# Altium PCB LEDLightRing_PCB.PcbDoc
Units mil, origin at the board's own origin, x right, y up, seen from the top; angles counter-clockwise.
Board outline 2220 x 2220 mil, 2 copper layers (Top Layer, Bottom Layer), stack 62 mil thick; 20 components, 19 nets, 82 pads, 10 vias.
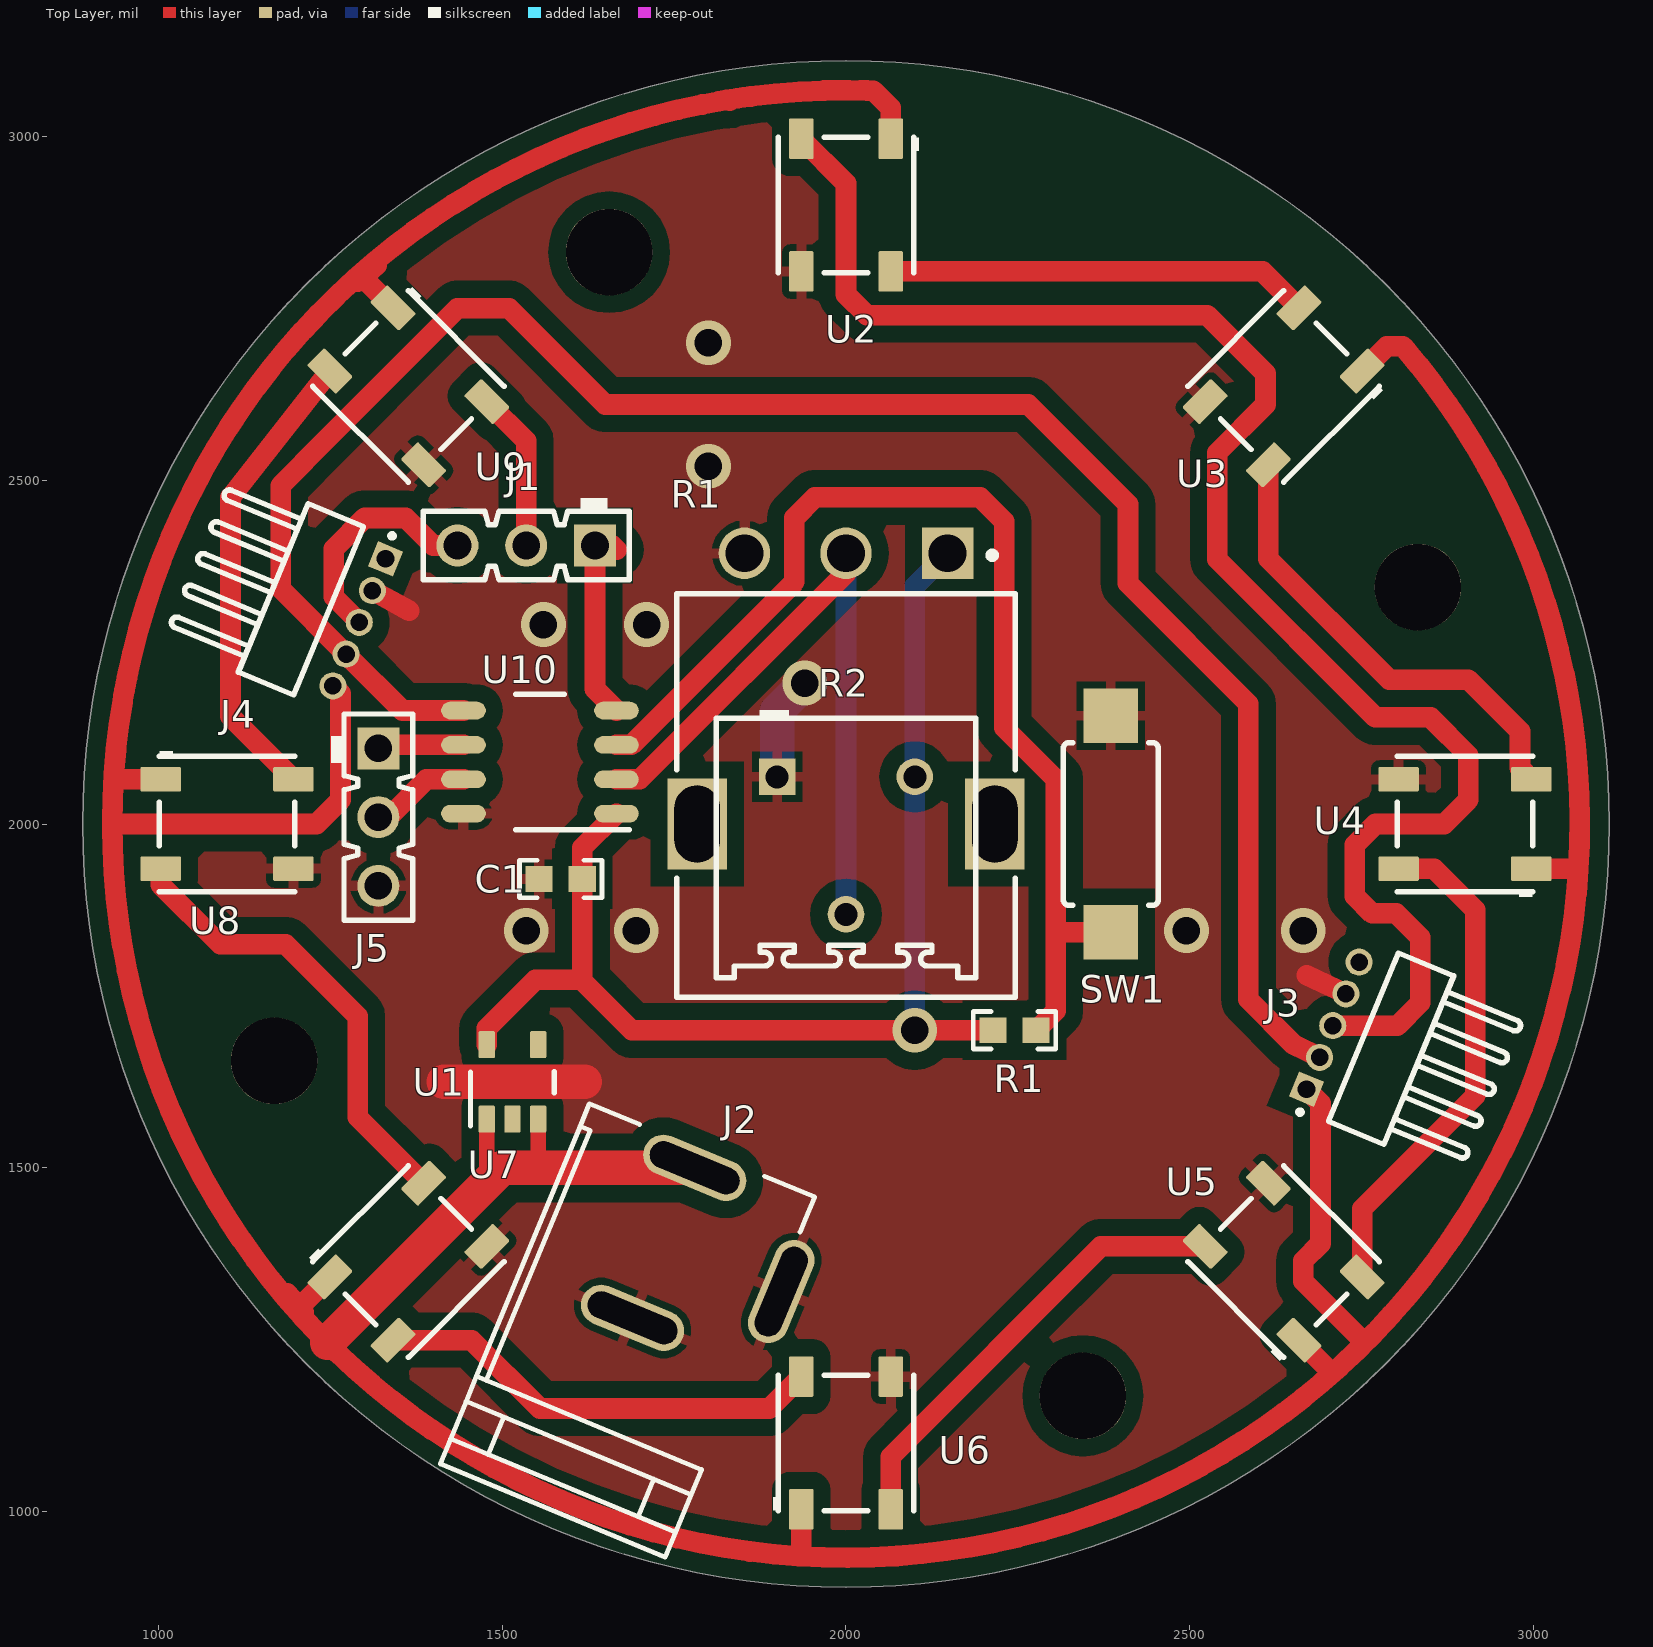
[diagram p0: Top Layer view]
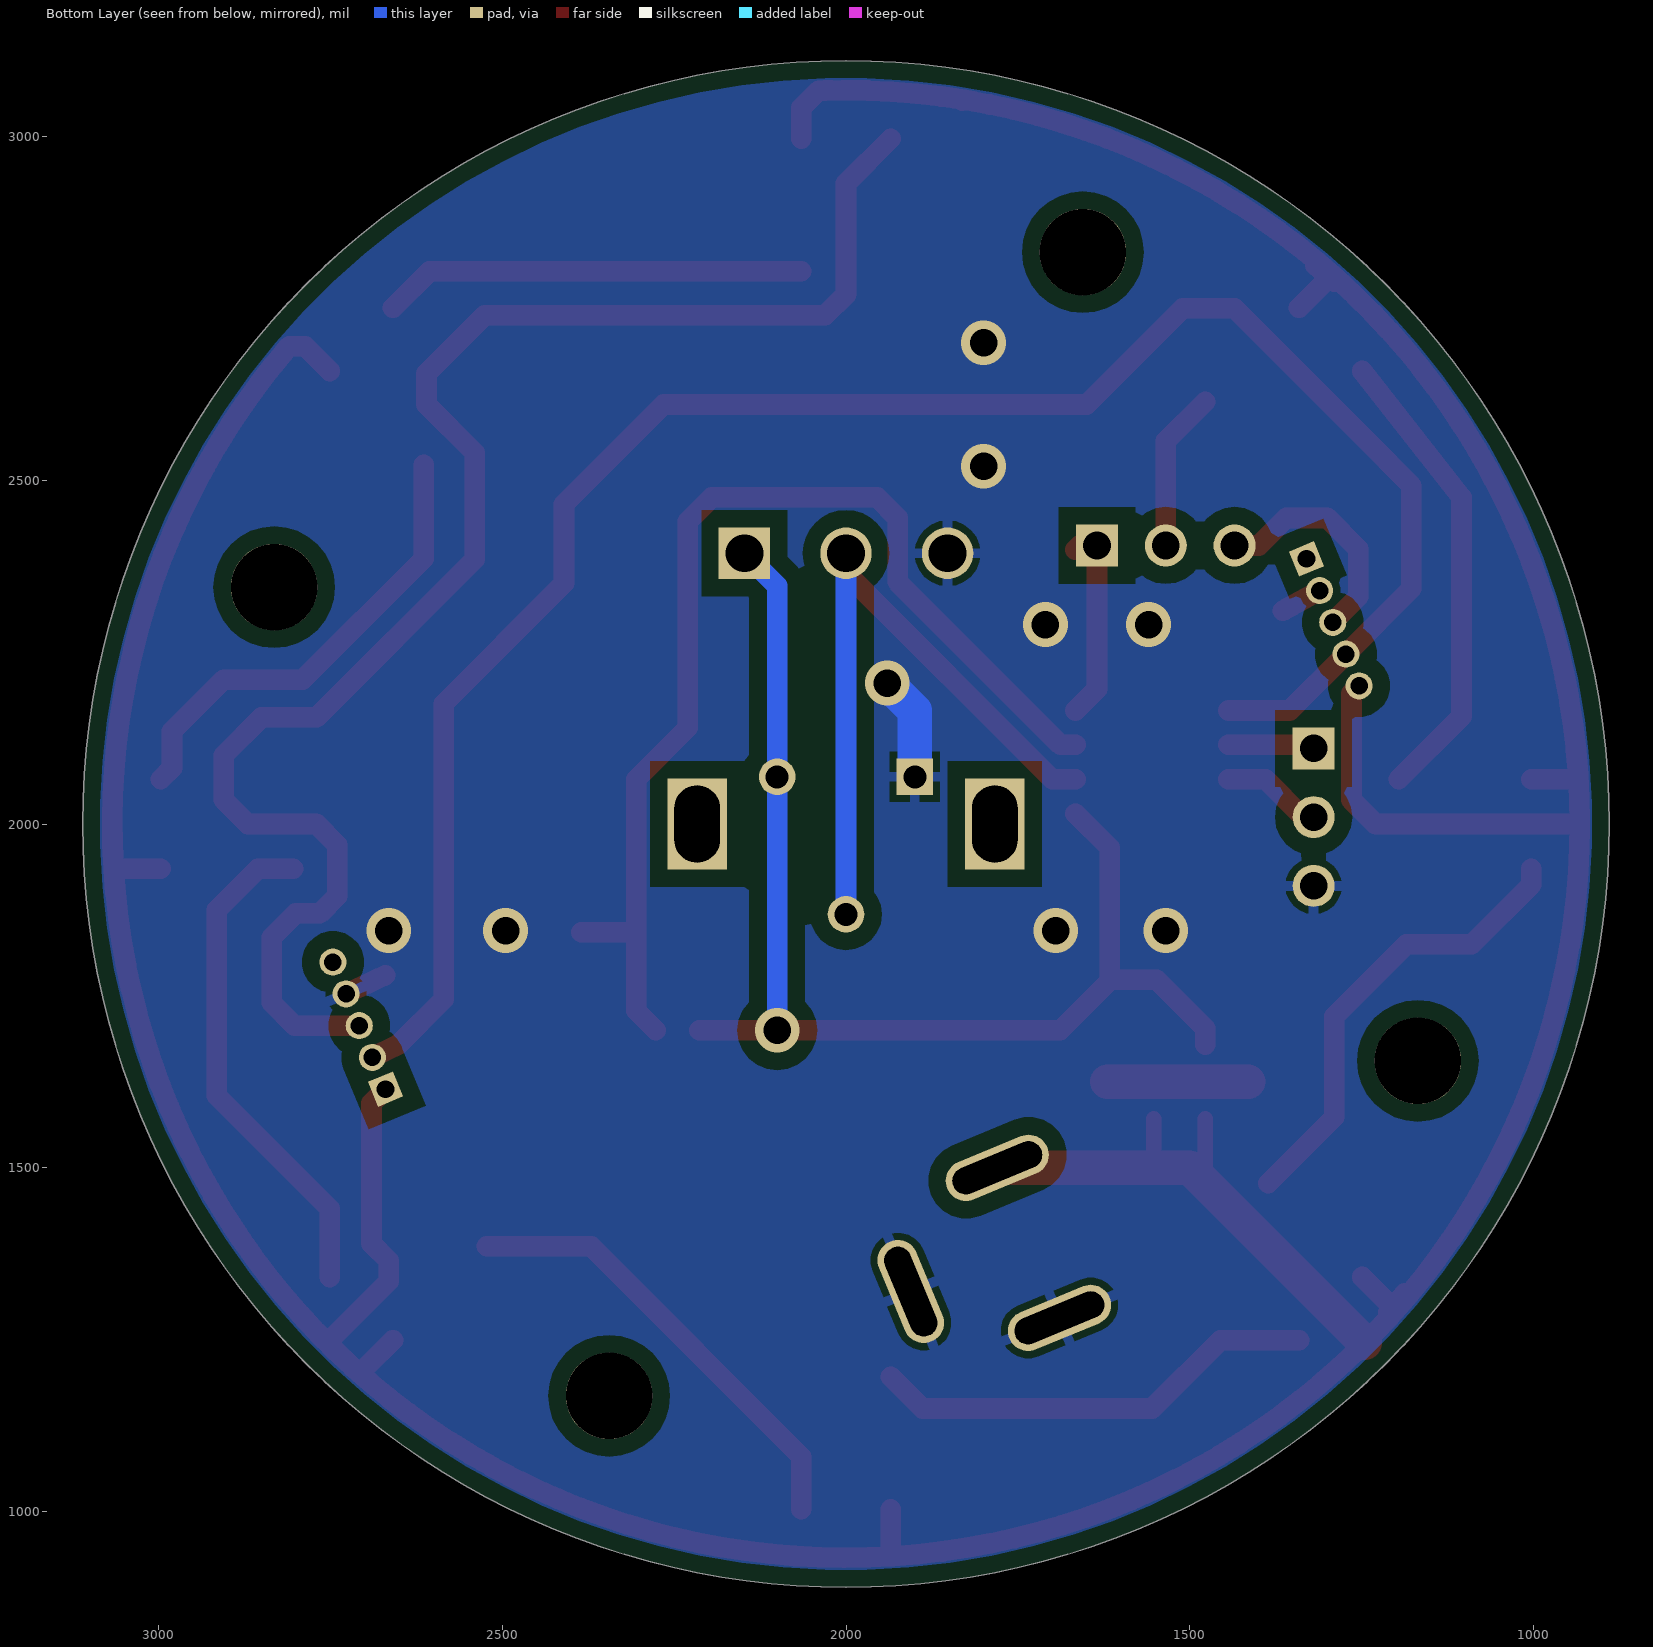
[diagram p1: Bottom Layer view, seen from below]
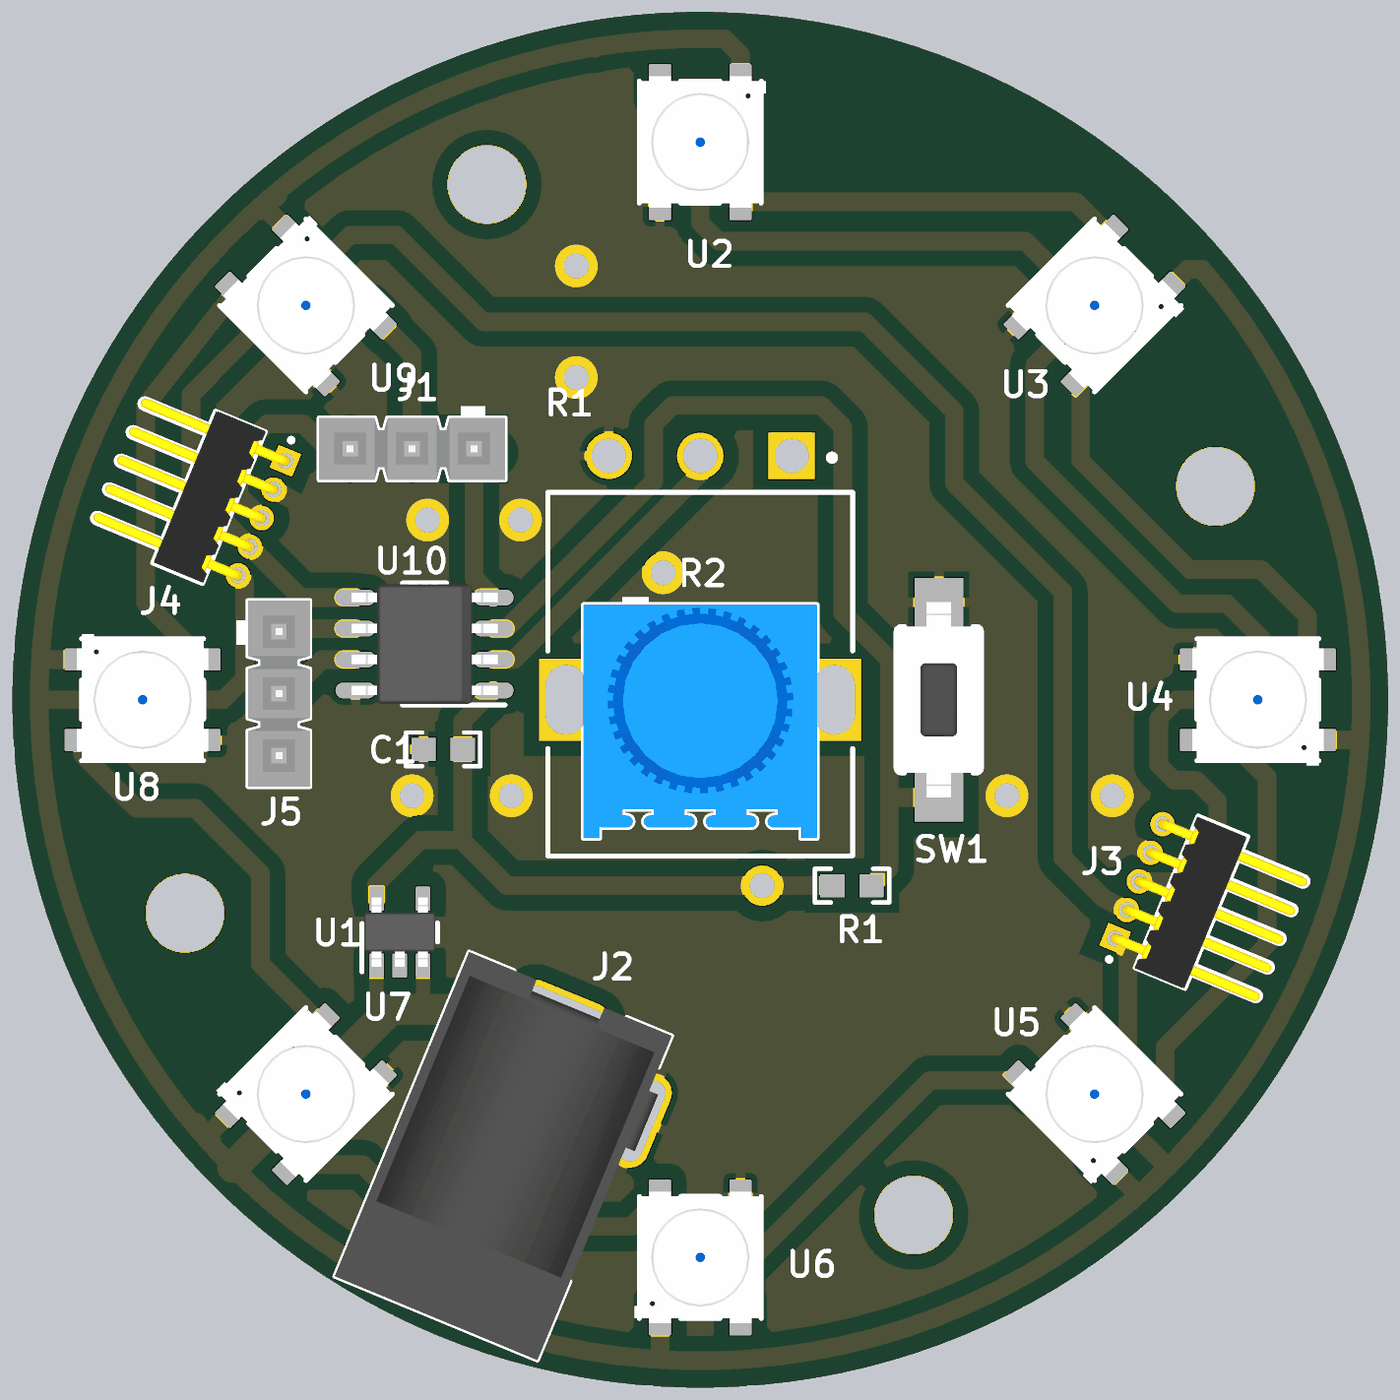
[diagram p2: 3D render of the assembled board from above, using the file's embedded part models]

## Layer stack, top to bottom
Top Solder: solder mask 0.4, Solder Resist, Dk 3.5
Top Layer: signal copper 1.4
Dielectric1: core 59.2, FR-4, Dk 4.8
Bottom Layer: signal copper 1.4
Bottom Solder: solder mask 0.4, Solder Resist, Dk 3.5

## Board outline
2000,890 cw(c2000,2000) 890,2000 cw(c2000,2000) 2000,3110 cw(c2000,2000) 3110,2000 cw(c2000,2000)

## Design rules (kind name [scope] priority, off if disabled: settings)
AcuteAngle [All] p1: minimum=4.50000000000000E+0001 checktracksonly=FALSE
AssemblyTestPointUsage [All] p1: valid=2
BoardOutlineClearance BoardOutlineClearance_MountingHoles [OnCopper and InComponentClass('Mounting Holes')] p1: gap=40 ignorepadtopadclearanceinfootprint=FALSE
BoardOutlineClearance BoardOutlineClearance_Poly [OnCopper and IsPoly] p2: gap=25 ignorepadtopadclearanceinfootprint=FALSE
BoardOutlineClearance [OnCopper and Not InComponentClass('Logo') and not InComponentClass('FiducialMark') and not InRegion(1000,500,4000,800) and not InPoly] p3: gap=15 ignorepadtopadclearanceinfootprint=FALSE
Clearance Clearance_Keepouts [((IsTrack Or IsArc) And Not InPoly) And IsFree and IsKeepOut vs ((IsTrack Or IsArc) And Not InPoly) And IsFree and IsKeepOut] p1: gap=0 ignorepadtopadclearanceinfootprint=FALSE
Clearance Clearance_Poly [InPolygon] p2: gap=25 ignorepadtopadclearanceinfootprint=FALSE except(0: Arc-Hole Track-Hole SMDPad-Hole THPad-Hole Via-Hole Fill-Hole Poly-Hole Region-Hole Text-Hole)
Clearance [All] p3: gap=7.87 ignorepadtopadclearanceinfootprint=FALSE except(0: Arc-Hole Track-Hole SMDPad-Hole THPad-Hole Via-Hole Fill-Hole Poly-Hole Region-Hole Text-Hole)
ComponentClearance ComponentClearance_MountingHoles_FiducialMarks [InComponentClass('Mounting Holes') vs InComponentClass('FiducialMark')] p1 off: gap=50 collisioncheckmode=3 verticalgap=10 showdistances=FALSE
ComponentClearance ComponentClearance_Shunt [InComponentClass('Header') vs InComponentClass('Shunt')] p2 off: gap=0 collisioncheckmode=3 verticalgap=0 showdistances=FALSE
ComponentClearance ComponentClearance_Logo [InComponentClass('Logo')] p3 off: gap=50 collisioncheckmode=3 verticalgap=10 showdistances=FALSE
ComponentClearance ComponentClearance_ScrewToNut [(HasFootprint('NY PMS 440 0025 PH')) vs (HasFootprint('Keystone_1902C'))] p4 off: gap=5 collisioncheckmode=3 verticalgap=10 showdistances=FALSE
ComponentClearance ComponentClearance_MountingHoles [InComponentClass('Mounting Holes')] p5 off: gap=250 collisioncheckmode=3 verticalgap=100000 showdistances=FALSE
ComponentClearance ComponentClearance_SmallPassives [HasFootprint('0201*') or HasFootprint('0402*') or HasFootprint('0508') or HasFootprint('0603*') or HasFootprint('0612') or HasFootprint('0805*') or HasFootprint('0815*') or HasFootprint('0830*') or HasFootprint('1206*') or HasFootprint('1210*') or HasFootprint('1808*') or HasFootprint('1812*') or HasFootprint('1825*') or HasFootprint('2010*') or HasFootprint('2220*') or HasFootprint('2225*') or HasFootprint('2512*') or HasFootprint('2728*') or HasFootprint('3518*') vs HasFootprint('0201*') or HasFootprint('0402*') or HasFootprint('0508') or HasFootprint('0603*') or HasFootprint('0612') or HasFootprint('0805*') or HasFootprint('0815*') or HasFootprint('0830*') or HasFootprint('1206*') or HasFootprint('1210*') or HasFootprint('1808*') or HasFootprint('1812*') or HasFootprint('1825*') or HasFootprint('2010*') or HasFootprint('2220*') or HasFootprint('2225*') or HasFootprint('2512*') or HasFootprint('2728*') or HasFootprint('3518*')] p6 off: gap=14.96 collisioncheckmode=3 verticalgap=10 showdistances=FALSE
ComponentClearance ComponentClearance_THtoSMT [IsThruComponent vs IsSMTComponent] p7 off: gap=40 collisioncheckmode=3 verticalgap=30 showdistances=FALSE
ComponentClearance ComponentClearance_THtoTH [IsThruComponent vs IsThruComponent] p8 off: gap=30 collisioncheckmode=3 verticalgap=30 showdistances=FALSE
ComponentClearance [All] p9 off: gap=5 collisioncheckmode=3 verticalgap=10 showdistances=FALSE
DiffPairsRouting [All] p1: maxlimit=100 minlimit=10 mostfreqgap=10 toplayer_minwidth=15 toplayer_maxwidth=15 toplayer_prefwidth=15 bottomlayer_minwidth=15 bottomlayer_maxwidth=15 bottomlayer_prefwidth=15 maxuncoupledlength=1000
FabricationTestPointUsage TestPointUsage [All] p1: valid=2 allowmultiple=FALSE
FabricationTestpoint Testpoint [All] p1: side=3 testpointundercomponent=TRUE minsize=40 maxsize=100 preferedsize=60 minholesize=0 maxholesize=40 preferedholesize=32 testpointgrid=1 allowsidetop=TRUE allowsidebottom=TRUE usegrid=TRUE gridtolerance=0.01
FanoutControl Fanout_LCC [IsLCC] p1: bgadir=Out bgaviamode=Centered fanoutstyle=Auto fanoutdirection=Alternating viagrid=1 // Fanout_LCC (Default Rule)
FanoutControl Fanout_BGA [IsBGA] p2: bgadir=Out bgaviamode=Centered fanoutstyle=Auto fanoutdirection=Alternating viagrid=1 // Fanout_BGA (Default Rule)
FanoutControl Fanout_Default [All] p4: bgadir=Out bgaviamode=Centered fanoutstyle=Auto fanoutdirection=Alternating viagrid=1 // Fanout_Default (Default Rule)
FanoutControl Fanout_Small [(CompPinCount < 5)] p5: bgadir=Out bgaviamode=Centered fanoutstyle=Auto fanoutdirection=OutThenIn viagrid=1 // Fanout_Small (Default Rule)
HoleSize [All] p1: absolutevalues=TRUE maxlimit=251 minlimit=7.87 maxpercent=80.000 minpercent=20.000
MinimumAnnularRing MinimumAnnularRing_ThermalPadVias [IsVia and InAnyComponent] p1 off: minimumring=5.91
MinimumAnnularRing [All] p2 off: minimumring=8
MinimumSolderMaskSliver MinimumSolderMaskSliver_Logo [InComponentClass('Logo') vs InComponentClass('Logo')] p1 off: minsoldermaskwidth=0.7
MinimumSolderMaskSliver [All] p2 off: minsoldermaskwidth=3.94
PlaneConnect [All] p1: planeconnectstyle=Relief reliefexpansion=10 reliefentries=4 reliefconductorwidth=10 reliefairgap=10
PolygonConnect PolygonConnect_Vias [All vs isVia] p1: connectstyle=Direct reliefconductorwidth=10 reliefentries=4 polygonreliefangle="90 Angle" airgapwidth=10
PolygonConnect [All] p2: connectstyle=Relief reliefconductorwidth=15 reliefentries=4 polygonreliefangle="90 Angle" airgapwidth=10
RoutingVias ThermalPadVias [IsVia and InAnyComponent] p1: holewidth=7.87 width=19.68 viastyle="Through Hole" minholewidth=7.87 minwidth=19.68 maxholewidth=12.99 maxwidth=23.62
RoutingVias [All] p2: holewidth=16 width=34 viastyle="Through Hole" minholewidth=7.87 minwidth=26 maxholewidth=40 maxwidth=65
SilkToBoardRegionClearance [Not ((IsComment or IsDesignator) And (Hide <> 'False')) and not InRegion(1000,500,4000,800)] p1:
SilkToSilkClearance SilkToSilkClearance_Pb-FreeLogo [(HasFootprint('Pb-Free_Overlay_Medium') OR HasFootprint('Pb-Free_Overlay_Small')) vs (HasFootprint('Pb-Free_Overlay_Medium') OR HasFootprint('Pb-Free_Overlay_Small'))] p1: silktosilkclearance=0
SilkToSilkClearance [All] p2: silktosilkclearance=4
SilkToSolderMaskClearance SilkToComponentPadClearance [(IsPad or IsFill or IsRegion) and InAnycomponent] p1: minsilkscreentomaskgap=5 clearancetoexposedcopper=TRUE
SilkToSolderMaskClearance "Silk to Solder Mask Opening" [All] p2: minsilkscreentomaskgap=4 clearancetoexposedcopper=FALSE
SolderMaskExpansion [All] p1: expansion=1.97
Width [All] p1: maxlimit=100 minlimit=6 preferedwidth=10 checkconnectedcopper=TRUE
15 further rules are at their usual default settings.

## Classes and differential pairs
component class Header: J1 J5

## Components (designator, comment, footprint, x,y, rotation, side; value= is the part's Value field where it differs from the comment)
C1 "UMK107AB7105KA-T" 0603 1585,1920 r180 top
J1 "TSW-103-07-T-S" Samtec_TSW-103-07-T-S 1535,2405 r180 top
J2 "PJ-202AH" CONN_CUI-PJ-202AH 1780,1500 r247.5 top
J3 "850-10-005-20-001000" Mill-Max_850-10-005-20-001000 2831.49,1655.58 r67.5 top
J4 "850-10-005-20-001000" Mill-Max_850-10-005-20-001000 1168.51,2344.42 r247.5 top
J5 "TSW-103-07-T-S" Samtec_TSW-103-07-T-S 1320,2010 r270 top
R1 "CRCW060310K0JNEA" 0603 2245,1700 r0 top
R1 "296UD104B1N" CTS_296UD 2000,2000 r270 top
R2 "3386F-1-104TLF" Bourns_3386F-T 2000,1965 r0 top
SW1 "RS-032G05A3-SM RT" SW_RS-032G05A3-SM 2385,2000 r270 top
U1 "TPS73633DBV" DBV0005A_N 1515,1625 r90 top
U2 "WS2812B" WS2812B 2000,2900 r270 top
U3 "WS2812B" WS2812B 2636.4,2636.4 r225 top
U4 "WS2812B" WS2812B 2900,2000 r180 top
U5 "WS2812B" WS2812B 2636.4,1363.6 r135 top
U6 "WS2812B" WS2812B 2000,1100 r90 top
U7 "WS2812B" WS2812B 1363.6,1363.6 r45 top
U8 "WS2812B" WS2812B 1100,2000 r0 top
U9 "WS2812B" WS2812B 1363.6,2636.4 r315 top
U10 "MSP430G2230QDREP" D0008A_M 1555,2090 r180 top

## Footprints (in the part's own frame and the unit in brackets; to place one, negate y for a bottom-side part, rotate by r counter-clockwise, add the part's x,y. Pads: shape width x height; smd on the part's side, far side on the other; paste and mask are expansions set on the pad)
0603 [mm] "0603 from SM-752 data"
  rect 1x0.95 smd: 1(-0.8,0) 2(0.8,0)
  silkscreen extent -1.52,-0.69 1.52,0.69, body extent -0.87,-0.47 0.87,0.47, height 1
Bourns_3386F-T [mm] "TH, 3-Leads, Body 9.53x9.53mm"
  rect 1.35x1.35 hole 0.85: 1(-2.54,2.632)
  round 1.35 hole 0.85: 2(0,-2.448) 3(2.54,2.632)
  silkscreen extent -4.79,-4.79 4.79,5.1, body extent -4.79,-4.79 4.79,4.79, height 10.54
CONN_CUI-PJ-202AH [mm] "Conn_DC Jack"
  oval 1.5x4 hole 1 slot 3.5 at 90 deg: 1(0,0) 2(6,0)
  oval 4x1.5 hole 1 slot 3.5 at 180 deg: 3(3,4.7)
  silkscreen extent -0.7,-4.5 13.7,4.5, body extent -0.7,-4.5 13.7,4.9, height 11.02
CTS_296UD [mm] "TH, 3-Leads, Body 12.5x12.8mm, Height 23.2mm"
  rect 1.9x1.9 hole 1.4: 1(-10,3.75)
  round 1.9 hole 1.4: 2(-10,0) 3(-10,-3.75)
  rect 3.35x2.2 hole 1.68 slot 2.85 at 0 deg: MH1(0,5.5) MH2(0,-5.5)
  silkscreen extent -10.05,-6.25 6.4,6.25, body extent -10.2,-6.25 6.4,6.25, height 23.2
D0008A_M [mm] "SOIC, 8-Leads, Body 4.9x3.9mm, Pitch 1.27mm, IPC Low Density"
  oval 1.65x0.65 smd: 1(-2.825,1.905) 2(-2.825,0.635) 3(-2.825,-0.635) 4(-2.825,-1.905) 5(2.825,-1.905) 6(2.825,-0.635) 7(2.825,0.635) 8(2.825,1.905)
  silkscreen extent -3.3,-2.5 0.9,2.5, body extent -3,-2.45 3,2.45, height 1.63
DBV0005A_N [mm] "SOT23, 5-Leads, Body 2.9x1.6mm, Pitch 0.95mm, Lead Span 2.8mm, IPC Medium Density"
  rrect17% 1x0.6 smd: 1(-1.375,0.95) 2(-1.375,0) 3(-1.375,-0.95) 4(1.375,-0.95) 5(1.375,0.95)
  silkscreen extent -1.63,-1.55 0.38,1.55, body extent -1.42,-1.46 1.42,1.46, height 1.09
Mill-Max_850-10-005-20-001000 [mm] "Mill-Max"
  rect 1x1 hole 0.65: 1(-2.54,3.4)
  round 1 hole 0.65: 2(-1.27,3.4) 3(0,3.4) 4(1.27,3.4) 5(2.54,3.4)
  silkscreen extent -3.47,-3.02 3.41,3.35, body extent -3.36,-3 3.38,3.59, height 2.21
Samtec_TSW-103-07-T-S [mm] "Header, 2.54 mm, 3x1, TH"
  rect 1.55x1.55 hole 1.02: 1(-2.54,0)
  round 1.55 hole 1.02: 2(0,0) 3(2.54,0)
  silkscreen extent -3.81,-1.75 3.81,1.27, body extent -3.81,-1.27 3.81,1.27, height 8.39
SW_RS-032G05A3-SM [mm] "SMT, 2-Leads, Body 6x3.5mm, Pin Spacing 8mm"
  rect 2x2 smd: 1(-4,0) 2(4,0)
  silkscreen extent -3,-1.75 3,1.75, body extent -4,-1.75 4,1.75, height 4.3
WS2812B [mm] "SMD, 4-Leads, Body 5x5mm"
  rrect11% 1.5x0.9 smd: 1(-2.45,1.65) 2(-2.45,-1.65) 3(2.45,-1.65) 4(2.45,1.65)
  silkscreen extent -2.5,-2.5 2.5,2.7, body extent -2.7,-2.5 2.7,2.5, height 1.67

## Part data
C1: "CAP, CERM, 1 µF, 50 V, +/- 10%, X7R, 0603"
J1 J5: "Header, 2.54 mm, 3x1, Tin, TH"
J2: "Connector, DC Jack 2.1X5.5 mm, TH"
J3 J4: "Header, 50mil, 5x1, R/A, TH"
R1: "RES, 10 k, 5%, 0.1 W, 0603"
R1: "Trimmer, 100k ohms, 0.15 W, TH"
R2: library part 3386F-1-103TLF, "TRIMMER 100K OHM 0.5W, TH"
SW1: "Switch, Tactile, SPST-NO, 0.05A, 12V, SMD"
U1: "Cap-Free, NMOS, 400mA Low-Dropout Regulator with Reverse Current Protection, DBV0005A"
U2 U3 U4 U5 U6 U7 U8 U9: "Intelligent Control LED Integrated Light Source"
U10: "Enhanced Product 16-bit Ultra-Low-Power Mixed Signal Microcontroller, 2kB Flash, 128B RAM, D0008A (SOIC-8)"

## Free pads (board coordinates)
  round 125.98 hole 125.98: 0(1168.51,1655.58) 0(1655.58,2831.49) 0(2344.42,1168.51) 0(2831.49,2344.42)

## Via types
v1: diameter 65, hole 40, Top Layer to Bottom Layer, 10 vias

## Nets (pads, with @x,y where several pads share a name; then routed paths per layer and width w, separated by ;. In a path a pad name is that pad's centre, name@x,y a point inside that pad or via, vN(x,y) a via of type N, cw(c..) or ccw(c..) an arc to the next point about the centre after c; other vN are vias at no path point)
GND: C1.2 J2.2 J2.3 J3.4 J4.2 J5.3 R1.3 R2.1 SW1.1 U1.2 U2.3 U3.3 U4.3 U5.3 U6.3 U7.3 U8.3 U9.3 U10.8 | length 497.2
  Top Layer w30: J4.2 1365,2310 ; v1@1700,2290 v1(1710,2290) ; v1(1800,2700) v1@1800,2705 ; 2670,1780 J3.4
  Top Layer w50: 1415,1625 1620,1625
  Bottom Layer w50: R2.1 1900,2165 v1(1940,2205)
  other v1: 1535,1845 1695,1845 2495,1845 2665,1845 1560,2290 1800,2520
NetJ1_1: J1.1 U10.4 | length 261.7
  Top Layer w30: J1.1 1635,2196.22 U10.4 ; J1.1@1660,2405 1666.22,2398.78
NetJ1_2: J1.2 U9.4 | length 232.8
  Top Layer w30: U9.4 1535,2556.87 J1.2
NetJ1_3: J1.3 J4.3 | length 337.4
  Top Layer w30: J4.3 1255,2330.37 1255,2400 1300,2445 1360,2445 1400,2405 J1.3
NetJ3_2: J3.2 J4.4 U10.5 | length 2874.2
  Top Layer w30: U10.5 1355.04,2165 J4.4 1178.04,2342 1178.04,2492.11 1211.9,2525.97 1211.9,2526.9 1435,2750 1510,2750 1650,2610 2265,2610 2410,2465 2410,2350 2585,2175 2585,1745 2650,1680 J3.2
NetJ3_3: J3.3 U2.2 | length 2380.7
  Top Layer w30: U2.2 2000,2931.5 2000,2770 2030,2740 2525,2740 2610,2655 2610,2610 2540,2540 2540,2385 2770,2155 2850,2155 2905,2100 2905,2035 2870,2000 2770,2000 2740,1970 2740,1895 2765,1870 2800,1870 2835,1835 2835,1740 2801.81,1706.81 J3.3
NetJ5_1: J5.1 U10.6 | length 125.9
  Top Layer w30: J5.1 1325,2115 U10.6
NetJ5_2: J5.2 U10.7 | length 146.6
  Top Layer w30: J5.2 1335,2010 1390,2065 U10.7
NetR1_2: R1.2@2276.5,1700 SW1.2 U10.3 | length 1645.8
  Top Layer w30: U10.3 1687.94,2115 1925,2352.06 1925,2445 1955,2475 2195,2475 2230,2440 2230,2140 2305,2065 2305,1840 ; R1.2@2276.5,1700 2305,1728.5 2305,1840 ; SW1.2 2307.52,1842.52 2305,1840
NetR1_2: R1.2@2000,2393.7 R2.2 U10.2 | length 1011.8
  Top Layer w30: U10.2 1700,2065 2000,2365 R1.2@2000,2393.7
  Bottom Layer w30: R2.2 R1.2@2000,2393.7
NetU2_4: U2.4 U3.2 | length 615.7
  Top Layer w30: U2.4 2605.66,2803.54 U3.2
NetU3_4: U3.4 U4.2 | length 683
  Top Layer w30: U3.4 2614.12,2385.88 2790,2210 2905,2210 2980,2135 2980,2081.42 U4.2
NetU4_4: U4.4 U5.2 | length 738.1
  Top Layer w30: U5.2 2750.54,1440.39 2915,1604.86 2915,1875 2854.96,1935.04 U4.4
NetU5_4: U5.4 U6.2 | length 660.4
  Top Layer w30: U6.2 2064.96,1079.96 2370.88,1385.88 U5.4
NetU6_4: U6.4 U7.2 | length 654.1
  Top Layer w30: U7.2 1455.54,1249.46 1555,1150 1888.58,1150 U6.4
NetU7_4: U7.4 U8.2 | length 671.3
  Top Layer w30: U8.2 1003.54,1911.46 1090,1825 1185,1825 1290,1720 1290,1573.62 U7.4
NetU8_4: U8.4 U9.2 | length 681.6
  Top Layer w30: U8.4 1105,2156.42 1105,2475 U9.2
P3V3: C1.1 R1.1 R2.3 U1.5 U10.1 | length 1795.3
  Top Layer w30: U1.5 1477.6,1702.6 1548.5,1773.5 1615,1773.5 ; U10.1 1616.5,1965.28 C1.1 1616.5,1775 1615,1773.5 ; R1.1@2213.5,1700 v1(2100,1700) 1688.5,1700 1615,1773.5
  Bottom Layer w30: v1(2100,1700) R2.3 2100,2346.06 R1.1@2147.64,2393.7
P5V: J2.1 J3.1 J4.5 U1.1 U1.3 U2.1 U3.1 U4.1 U5.1 U6.1 U7.1 U8.1 U9.1 | length 8429.4
  Top Layer w23: 1477.5,1477.5 1477.6,1477.6 U1.1 ; 1550,1500 1552.4,1502.4 U1.3 ; 1597.6,1502.4 1600,1500 ; 1670,1500 1672.4,1502.4
  Top Layer w30: 933.18,1981.38 cw(c2000,2000) 933.02,2000 ; 933.18,2018.62 ccw(c2000,2000) 933.02,2000 ; 949.23,2185.28 cw(c2000,2000) 952.62,2203.59 cw(c2000,2000) 956.33,2221.84 ; 950.47,2064.96 U8.1 ; 1187.09,1317.89 ccw(c2000,2000) 1199.12,1303.8 ; 1232.48,1258.81 ccw(c2000,2000) 1245.53,1245.53 ccw(c2000,2000) 1258.81,1232.48 ; U7.1 1211.94,1303.8 1199.12,1303.8 ; J4.5 1265,2189.71 1265,2035 1230,2000 933.02,2000 ; 1289.93,2788.61 cw(c2000,2000) 1303.8,2800.88 ; 1317.89,2812.91 ccw(c2000,2000) 1303.8,2800.88 ; U9.1 1303.8,2788.06 1303.8,2800.88 ; 1814.72,3050.77 cw(c2000,2000) 1833.09,3053.85 ; 1830.87,3051.62 1833.09,3053.85 ; 1851.5,3056.6 ccw(c2000,2000) 1833.09,3053.85 ; 1935.04,950.47 U6.1 ; 2021.24,3066.77 cw(c2000,2000) 2039.86,3066.24 ; U2.1 2064.96,3041.14 2039.86,3066.24 ; U5.1 2696.74,1211.39 ; J3.1 2690,1593.98 2690,1390 2665,1365 2665,1335 2754.47,1245.53 ; 2741.19,1232.48 ccw(c2000,2000) 2754.47,1245.53 ; U3.1 2786.66,2694.79 2809.76,2694.79 ; 2767.52,1258.81 cw(c2000,2000) 2754.47,1245.53 ; 2819.04,2683.83 ccw(c2000,2000) 2809.76,2694.79 ; 2874.02,1388 ccw(c2000,2000) 2884.57,1403.35 ccw(c2000,2000) 2894.85,1418.88 ; U4.1 3049.53,1935.04 ; 1199.12,1303.8 ccw(c2000,2000) 1211.39,1289.93 cw(c2000,2000) 1199.12,1303.8 ; 2039.86,3066.24 ccw(c2000,2000) 2809.76,2694.79
  Top Layer w50: 1245.53,1245.53 1477.5,1477.5 ; 1477.6,1477.6 1500,1500 1550,1500 1600,1500 1670,1500 J2.1
pads on no net: J3.5 J4.1 R1.MH1 R1.MH2 U1.4

## Polygon pours and split planes (outlines as drawn)
GND on Top Layer "TOP_LAYER_GND_P000" (solid, remove dead copper, pour order 0): 890,3110 3105,3110 3105,1750 3105,895 1925,895 890,895 890,3110
GND on Bottom Layer "BOTTOM_LAYER_GND_P002" (solid, remove dead copper, pour order 2): 890,3110 3105,3110 3105,1750 3105,895 1925,895 890,895 890,3110

## Silkscreen, mask and mechanical layers (free items; w line width, h text height)
M1 Board Outline:
  circle w10: c2000,2000 r1110
M9 Title Sheet:
  drawing of 57 lines, arcs and shapes, not listed
  text "1" at 739.84,8036.5 h70
  text "2" at 3235.5,8036.5 h70
  text "3" at 5724.84,8036.5 h70
  text "4" at 8231.51,8036.5 h70
  text "5" at 10730.5,8036.5 h70
  text "6" at 13235.5,8036.5 h70
  text "A" at -416.5,6893.5 h70
  text "A" at 14383.5,6893.5 h70
  text "B" at -416.5,4513.5 h70
  text "B" at 14383.5,4513.5 h70
  text "C" at -416.5,2138.5 h70
  text "C" at 14383.5,2138.5 h70
  text "PROJECT TITLE:" at 11343.5,277.5 h45
  text ".PRJ_Title" at 11393.5,144.17 h70
  text "DESIGNED FOR:" at 11343.5,-23.5 h45
  text ".PRJ_Customer" at 11393.5,-163.5 h70
  text "D" at -416.5,-231.5 h70
  text "D" at 14383.5,-231.5 h70
  text "FILE NAME:" at 11343.5,-323.5 h45
  text ".PCB_File_Name_No_Path" at 11393.5,-443.5 h70
  text "Texas Instruments (TI) and/or its licensors do not warrant the accuracy or completeness of this specification" at 6374,-605.34 h45
  text "ENGINEER:" at 11343.5,-613.5 h45
  text "LAYOUT BY:" at 12848.5,-613.5 h45
  text "or any information contained therein. TI and/or its licensors do not warrant that this design will meet" at 6329.01,-718 h45
  text ".PRJ_Engineer" at 11393.5,-768.49 h70
  text ".PCB_Layout" at 12899,-768.49 h70
  text "the specifications, will be suitable for your application or fit for any particular purpose, or will operate in" at 6329.01,-830.67 h45
  text ".Layer_Name" at 577,-858.49 h60
  text "ALTIUM DESIGNER VERSION:" at 12848.5,-923.5 h45
  text "an implementation. TI and/or its licensors do not warrant that the design is production worthy. You should" at 6329.01,-943.33 h45
  text "completely validate and test your design implementation to confirm the system functionality for your application." at 6374,-1056 h45
  text ".print_Scale" at 11393.5,-1056.83 h70
  text ".Application_BuildNumber" at 12899,-1056.83 h70
  text "1" at 739.84,-1263.5 h70
  text "2" at 3235.5,-1263.5 h70
  text "3" at 5724.84,-1263.5 h70
  text "4" at 8231.51,-1263.5 h70
  text "5" at 10730.5,-1263.5 h70
  text "6" at 13235.5,-1263.5 h70

## Text inside footprints (layer, text, board x,y; h text height)
J2: M1 Board Outline "board edge" at 1267.28,1064.64 h35 r337.5